# EAGLE board adapter RX2189 (EAGLE 9.3.1)
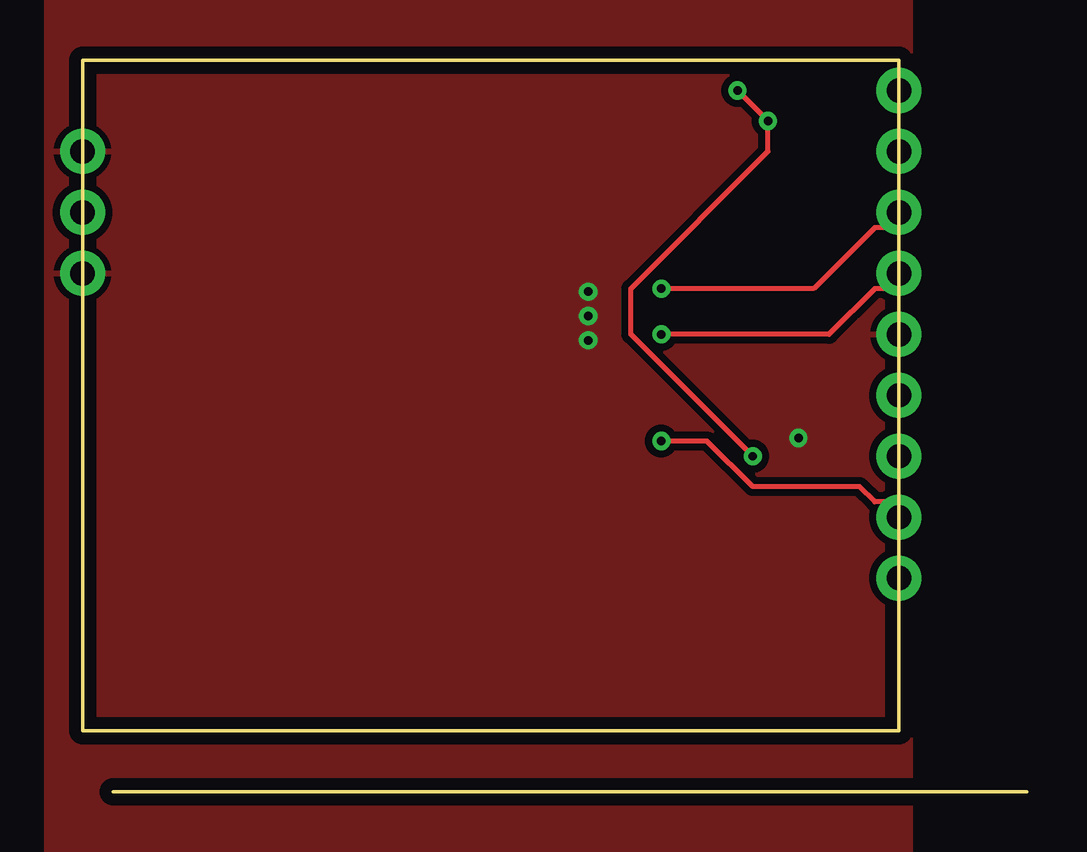
[diagram p0: board, top side]
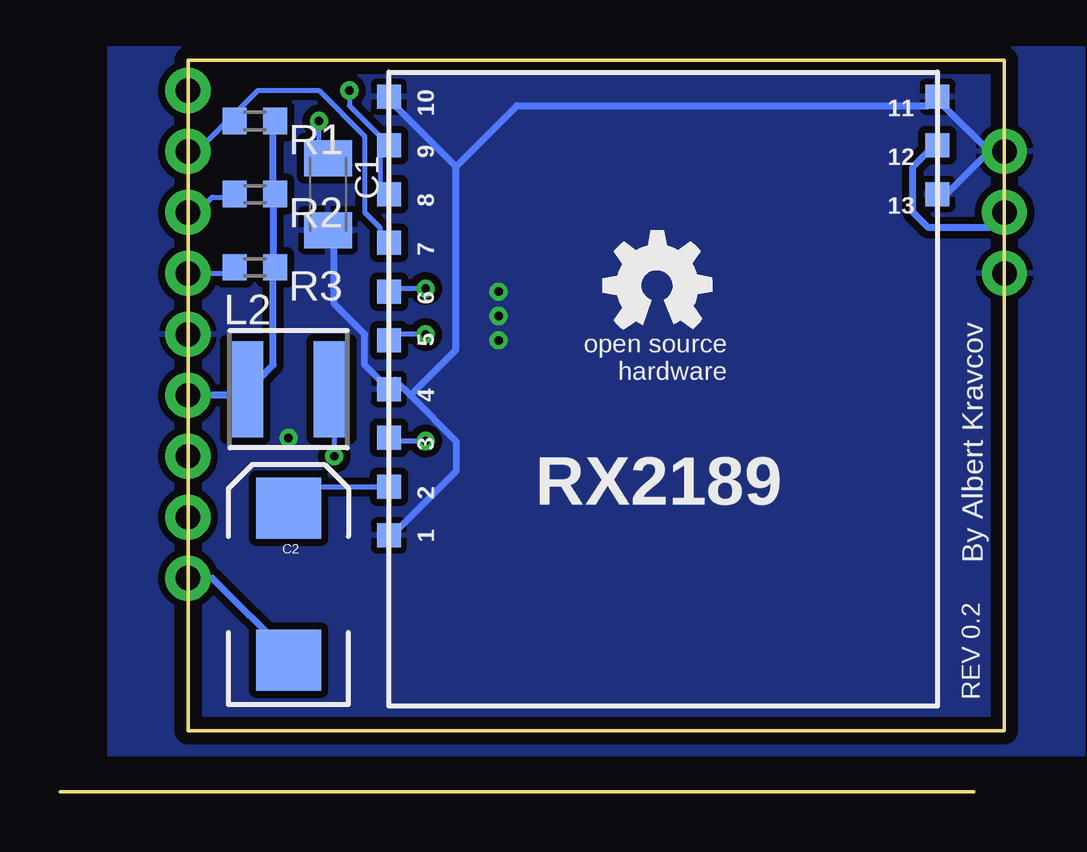
[diagram p1: board, bottom side, seen from below]

Size 39.37 x 30.48 mm. Coordinates in mm from the lower left corner, seen from the top.
Outline: 0,2.54 0,30.48 34.04,30.48 34.04,2.54 0,2.54
Copper layers (1*16): Top 0.035mm / dielectric 1.5mm / Bottom 0.035mm
Design rules "default *": minimum track width 6mil, minimum drill 0.35mm, track to track 6mil, track to pad 6mil, pad to pad 6mil, via to via 6mil, smd to smd 6mil, copper to edge 0.5mm, drill to drill 6mil, minimum pad ring 10mil, minimum via ring 8mil, stop-mask expansion 4mil, vias tented up to drill 2mm, thermal gap 10mil
Net classes: 0 default: width 0.2 mm, clearance 0.2 mm; 1 power: width 0.3 mm, drill 0.3 mm, clearance 0.3 mm

## Footprints (pad centres in the part's own frame; a part is rotated, then mirrored left to right if it is on the bottom)
TP10SQ = smd 1 x 1: TP 0,0
C1206K = smd 1.5 x 2: 1 -1.5,0; 2 1.5,0
EIA7343 = smd 2.55 x 2.7: A 3.17,0; C -3.17,0
1X01NS_KIT = drill 1.016 pad 1.88: 1 0,0
POWER-CHOKE_WE-TPC = smd 6.3 x 2.2: 1 0,2.05; 2 0,-2.05
INDM4949X200N = smd 1.5 x 4: 1 -1.8,0; 2 1.8,0
R0603 = smd 1 x 1.1: 1 -0.85,0; 2 0.85,0

## Placement (x,y rotation side)
1  TPTP10SQ  [TP10SQ]  25.65,10.67 0 bottom
2  TPTP10SQ  [TP10SQ]  25.65,12.7 0 bottom
3  TPTP10SQ  [TP10SQ]  25.65,14.73 0 bottom
4  TPTP10SQ  [TP10SQ]  25.65,16.76 0 bottom
5  TPTP10SQ  [TP10SQ]  25.65,18.8 0 bottom
6  TPTP10SQ  [TP10SQ]  25.65,20.83 0 bottom
7  TPTP10SQ  [TP10SQ]  25.65,22.86 0 bottom
8  TPTP10SQ  [TP10SQ]  25.65,24.89 0 bottom
9  TPTP10SQ  [TP10SQ]  25.65,26.92 0 bottom
10  TPTP10SQ  [TP10SQ]  25.65,28.96 0 bottom
11  TPTP10SQ  [TP10SQ]  2.79,28.96 0 bottom
12  TPTP10SQ  [TP10SQ]  2.79,26.92 0 bottom
13  TPTP10SQ  [TP10SQ]  2.79,24.89 0 bottom
C1  [C1206K]  28.19,24.89 270 bottom
C2  470uf  [EIA7343]  29.84,8.64 90 bottom
J1  [1X01NS_KIT]  34.04,29.21 0 top
J2  [1X01NS_KIT]  34.04,26.67 0 top
J3  [1X01NS_KIT]  34.04,24.13 0 top
J4  [1X01NS_KIT]  34.04,21.59 0 top
J5  [1X01NS_KIT]  34.04,19.05 0 top
J6  [1X01NS_KIT]  34.04,16.51 0 top
J7  [1X01NS_KIT]  34.04,13.97 0 top
J8  [1X01NS_KIT]  34.04,11.43 0 top
J9  [1X01NS_KIT]  34.04,8.89 0 top
J10  [1X01NS_KIT]  0,21.59 0 top
J11  [1X01NS_KIT]  0,24.13 0 top
J12  [1X01NS_KIT]  0,26.67 0 top
L1  [POWER-CHOKE_WE-TPC]  14.99,37.08 0 bottom  (outside the outline)
L2  NR4018T101M  [INDM4949X200N]  29.84,16.76 0 bottom
R1  [R0603]  31.24,27.94 0 bottom
R2  [R0603]  31.24,24.89 0 bottom
R3  [R0603]  31.24,21.84 0 bottom
U$2  [OSHW_5MM]  14.48,21.08 0 bottom

## Library data of the parts
1-13 = testpad
C1 R1-R3 = resistor
C2 = SparkFun-Passives
J1-J12 = SparkFun-Connectors
L1 = rcl; SPICEPREFIX: L
L2 = NRS5020T220MMGJ; AVAILABILITY: Unavailable; DESCRIPTION: Inductor Power Shielded Wirewound 22uH 20% 100KHz Ferrite 1A 312mOhm DCR T/R; MF: Taiyo Yuden; MP: NRS5020T220MMGJ; PACKAGE: Nonstandard Taiyo Yuden; PRICE: None
U$2 = oshw

## Nets
5V [power]: J6.1 L2.1 R1.2 R2.2 R3.2
5VFILTERED: 8.TP 9.TP C1.1 L2.2
A60: J7.1
A65: 3.TP J8.1
ANT [power]: 12.TP J11.1
BX: J1.1
CH1: 5.TP J4.1 R3.1
CH2: 6.TP J3.1 R2.1
CH3: 7.TP J2.1 R1.1
GND [power]: 1.TP 4.TP 10.TP 11.TP 13.TP C1.2 J5.1 J10.1 J12.1
N$1: 2.TP C2.A
VID [power]: C2.C J9.1

## Tracks (layer width: path | path; a pad name or v marks a point on that pad's centre or on a via)
5V
  Bottom 0.3: R1.2 30.48,27.94 30.48,25.4 R2.2 30.48,24.77 30.48,22.23 R3.2 30.48,21.59 30.48,17.78 31.11,17.14 L2.1 31.75,16.51 J6.1
5VFILTERED  (via drill 0.35)
  Top 0.2: v27.3,29.21 v28.57,27.94 28.57,26.67 22.86,20.96 22.86,19.05 v27.94,13.97
  Bottom 0.2: 8.TP 26.04,24.77 26.04,26.67 9.TP 27.3,28.57 v27.3,29.21 | v28.57,27.94 28.57,26.67 C1.1 | v27.94,13.97 27.94,16.51 L2.2
A65  (via drill 0.35)
  Top 0.2: v24.13,14.61 26.04,14.61 27.94,12.7 32.38,12.7 33.02,12.07 33.65,12.07 34.29,11.43 J8.1
  Bottom 0.2: v24.13,14.61 25.4,14.61 3.TP
ANT
  Bottom 0.3: J11.1 0.64,23.5 3.18,23.5 3.81,24.13 3.81,26.04 3.18,26.67 12.TP
CH1  (via drill 0.35)
  Top 0.2: v24.13,19.05 31.11,19.05 33.02,20.96 33.65,20.96 34.29,21.59 J4.1
  Bottom 0.2: v24.13,19.05 25.4,19.05 5.TP | J4.1 32.38,21.59 R3.1
CH2  (via drill 0.35)
  Top 0.2: v24.13,20.96 30.48,20.96 33.02,23.5 33.65,23.5 34.29,24.13 J3.1
  Bottom 0.2: v24.13,20.96 25.4,20.96 6.TP | R2.1 32.38,24.77 33.02,24.77 33.65,24.13 J3.1
CH3
  Bottom 0.2: 32.38,27.94 31.11,29.21 28.57,29.21 26.67,27.3 26.67,24.13 26.04,23.5 26.04,22.86 7.TP | 32.38,27.94 33.65,26.67 J2.1 | 32.38,27.94 R1.1
GND  (via drill 0.35)
  Bottom 0.3: 0.64,26.67 2.54,24.77 13.TP | 0.64,26.67 2.54,28.57 11.TP 3.18,28.57 20.32,28.57 22.86,26.04 | 0.64,26.67 J12.1 | 24.77,16.51 25.4,17.14 4.TP 26.67,17.78 26.67,19.05 27.94,20.32 27.94,22.86 C1.2 | 24.77,16.51 22.86,14.61 22.86,13.34 25.4,10.8 1.TP | 22.86,26.04 25.4,28.57 10.TP | 22.86,26.04 22.86,18.41 24.77,16.51
  other vias: 21.08,20.83 21.08,19.81 21.08,18.8 29.84,14.73
  pour Top: -1.52,33.02 34.54,33.02 34.54,-2.54 -1.52,-2.54
  pour Bottom: -2.29,30.99 37.34,30.99 37.34,1.52 -3.3,1.52 -3.3,30.99
N$1
  Bottom 0.2: 2.TP 29.21,12.7 29.84,12.07 C2.A
VID
  Bottom 0.3: J9.1 33.02,8.89 29.84,5.72 C2.C

## Text on the board
bPlace: By Albert Kravcov | REV 0.2
bNames: RX2189